# Altium PCB SSOP-TSSOP20.PcbDoc
Units mil, origin at the board's own origin, x right, y up, seen from the top; angles counter-clockwise.
Board outline 800 x 1000 mil, 2 copper layers (Top Layer, Bottom Layer); 3 components, 20 nets, 40 pads, 0 vias.
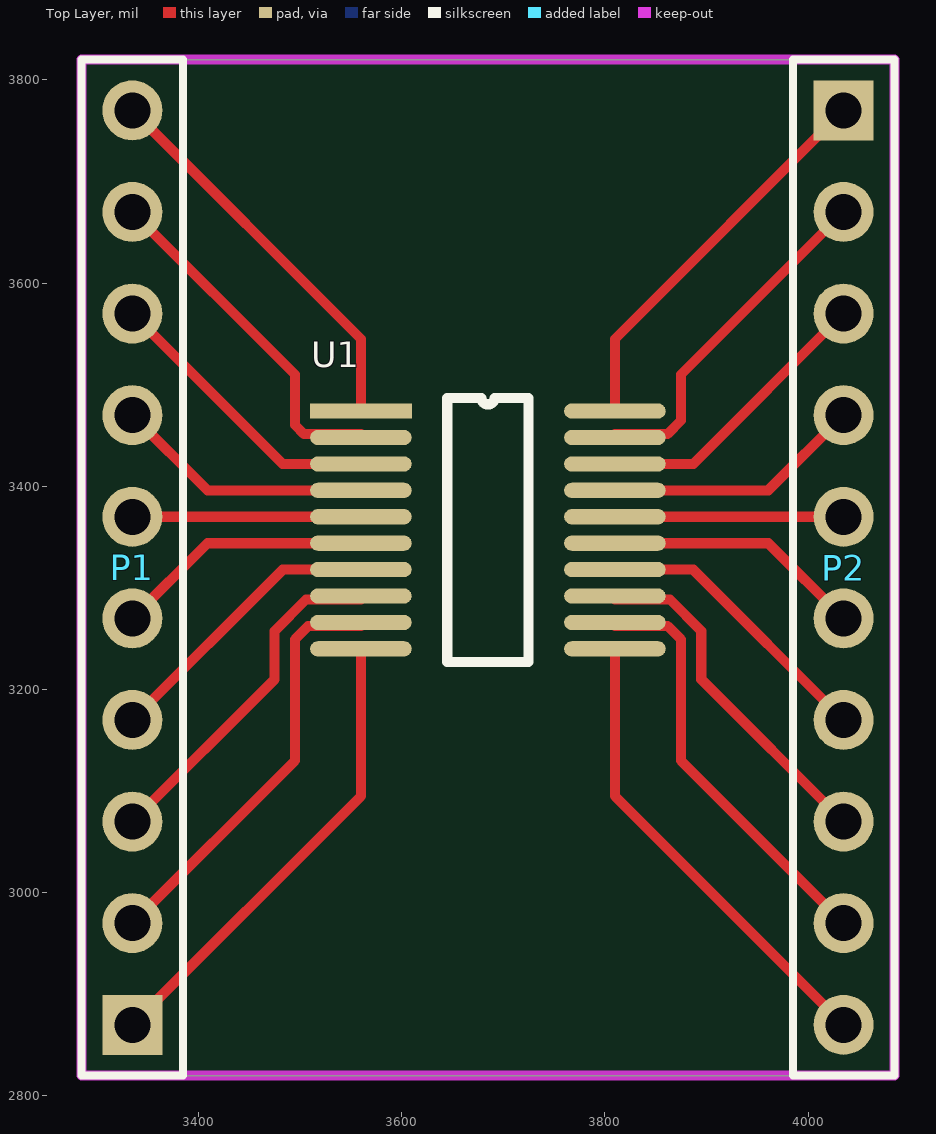
[diagram p0: Top Layer view]
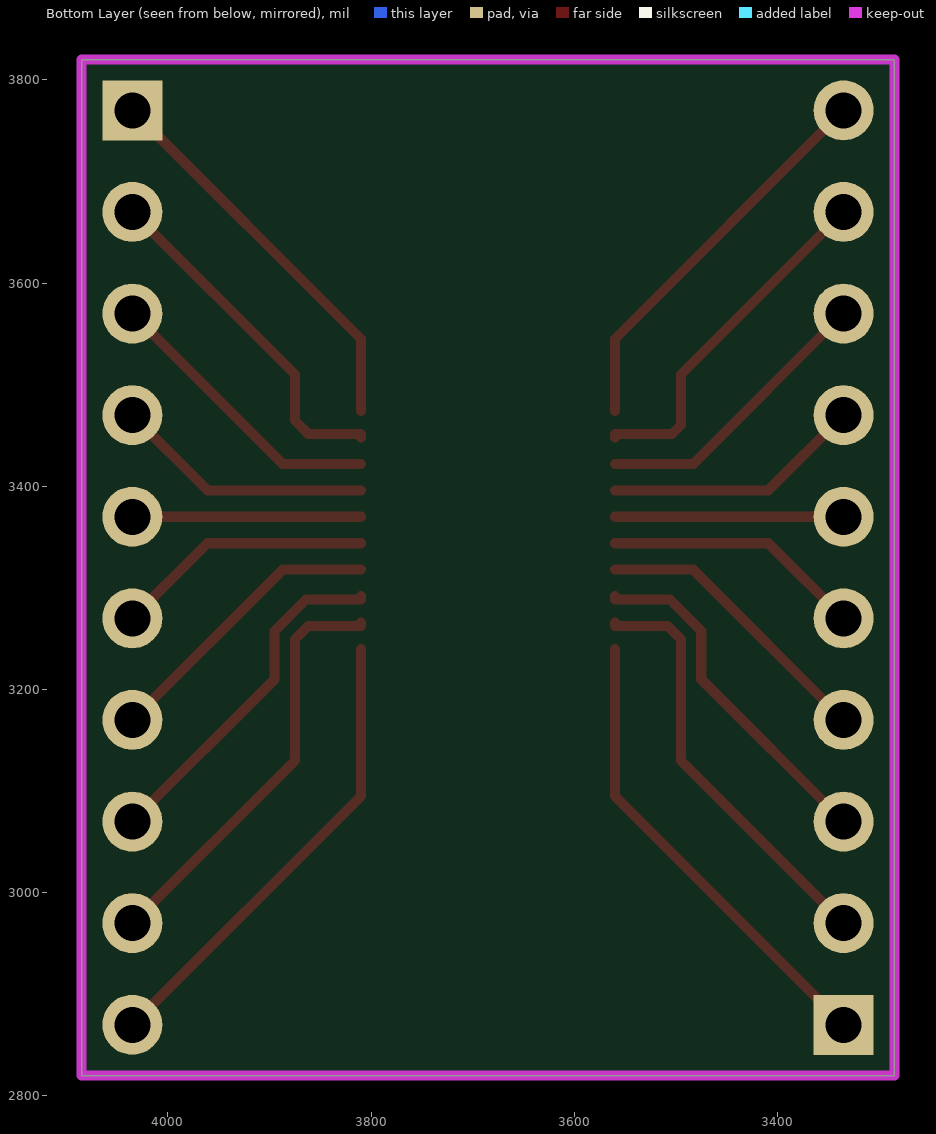
[diagram p1: Bottom Layer view, seen from below]

## Layer stack, top to bottom
Top Solder: solder mask 0.4, Solder Resist, Dk 3.5
Top Layer: signal copper 1.4
Dielectric 1: dielectric 12.6, FR-4, Dk 4.8
Bottom Layer: signal copper 1.4
Bottom Solder: solder mask 0.4, Solder Resist, Dk 3.5

## Board outline
3285,2820 4085,2820 4085,3820 3285,3820

## Design rules (kind name [scope] priority, off if disabled: settings)
Clearance [All] p1: gap=10 ignorepadtopadclearanceinfootprint=FALSE except(0: Arc-Hole Track-Hole SMDPad-Hole THPad-Hole Via-Hole Fill-Hole Poly-Hole Region-Hole Text-Hole)
PolygonConnect [All] p1: connectstyle=Relief reliefconductorwidth=10 reliefentries=4 polygonreliefangle="90 Angle" airgapwidth=10
RoutingVias [All] p1: holewidth=28 width=50 viastyle="Through Hole" minholewidth=28 minwidth=50 maxholewidth=28 maxwidth=50
SolderMaskExpansion [All] p1: expansion=4
Width [All] p1: maxlimit=10 minlimit=10 preferedwidth=10
30 further rules are at their usual default settings.

## Components (designator, comment, footprint, x,y, rotation, side; value= is the part's Value field where it differs from the comment)
P1 "Header 10" HDR1X10 3335,2870 r90 top
P2 "Header 10" HDR1X10 4035,3770 r270 top
U1 "SSOP-TSSOP20" SSOP-TSSOP20 3560,3474 r0 top (schematic designator *)

## Footprints (in the part's own frame and the unit in brackets; to place one, negate y for a bottom-side part, rotate by r counter-clockwise, add the part's x,y. Pads: shape width x height; smd on the part's side, far side on the other; paste and mask are expansions set on the pad)
HDR1X10 [mm] "Connector; Header; 10 Position"
  rect 1.5x1.5 hole 0.9: 1(0,0)
  round 1.5 hole 0.9: 2(2.54,0) 3(5.08,0) 4(7.62,0) 5(10.16,0) 6(12.7,0) 7(15.24,0) 8(17.78,0) 9(20.32,0) 10(22.86,0)
  silkscreen extent -1.27,-1.27 24.13,1.27
SSOP-TSSOP20 [mil]
  rect 100x15 smd: 1(0,0)
  oval 100x15 smd: 2(0,-26) 3(0,-52) 4(0,-78) 5(0,-104) 6(0,-130) 7(0,-156) 8(0,-182) 9(0,-208) 10(0,-234) 11(250,-234) 12(250,-208) 13(250,-182) 14(250,-156) 15(250,-130) 16(250,-104) 17(250,-78) 18(250,-52) 19(250,-26) 20(250,0)
  silkscreen extent 85,-247 165,13

## Part data
P1 P2: "Header, 10-Pin", LatestRevisionDate=17-Jul-2002, LatestRevisionNote="Re-released for DXP Platform.", Publisher="Altium Limited"

## Nets (pads, with @x,y where several pads share a name; then routed paths per layer and width w, separated by ;. In a path a pad name is that pad's centre, name@x,y a point inside that pad or via, vN(x,y) a via of type N, cw(c..) or ccw(c..) an arc to the next point about the centre after c; other vN are vias at no path point)
Net*_1: P1.10 U1.1 | length 389.2
  Top Layer w10: P1.10 3560,3545 U1.1
Net*_2: P1.9 U1.2 | length 348.1
  Top Layer w10: P1.9 3495,3510 3495,3460.29 3503.79,3451.5 3560,3451.5 U1.2
Net*_3: P1.8 U1.3 | length 286.3
  Top Layer w10: P1.8 3483,3422 U1.3
Net*_4: P1.7 U1.4 | length 255.7
  Top Layer w10: P1.7 3409,3396 U1.4
Net*_5: P1.6 U1.5 | length 225
  Top Layer w10: P1.6 U1.5
Net*_6: P1.5 U1.6 | length 255.7
  Top Layer w10: P1.5 3409,3344 U1.6
Net*_7: P1.4 U1.7 | length 286.3
  Top Layer w10: P1.4 3483,3318 U1.7
Net*_8: P1.3 U1.8 | length 346.9
  Top Layer w10: P1.3 3475,3210 3475,3257.6 3505.9,3288.5 3560,3288.5 U1.8
Net*_9: P1.2 U1.9 | length 419.6
  Top Layer w10: P1.2 3495,3130 3495,3249.32 3508.18,3262.5 3560,3262.5 U1.9
Net*_10: P1.1 U1.10 | length 463.2
  Top Layer w10: P1.1 3560,3095 U1.10
Net*_11: P2.10 U1.11 | length 463.2
  Top Layer w10: U1.11 3810,3095 P2.10
Net*_12: P2.9 U1.12 | length 419.6
  Top Layer w10: U1.12 3810,3262.5 3861.82,3262.5 3875,3249.32 3875,3130 P2.9
Net*_13: P2.8 U1.13 | length 346.9
  Top Layer w10: U1.13 3810,3288.5 3864.1,3288.5 3895,3257.6 3895,3210 P2.8
Net*_14: P2.7 U1.14 | length 286.3
  Top Layer w10: U1.14 3887,3318 P2.7
Net*_15: P2.6 U1.15 | length 255.7
  Top Layer w10: U1.15 3961,3344 P2.6
Net*_16: P2.5 U1.16 | length 225
  Top Layer w10: U1.16 P2.5
Net*_17: P2.4 U1.17 | length 255.7
  Top Layer w10: U1.17 3961,3396 P2.4
Net*_18: P2.3 U1.18 | length 286.3
  Top Layer w10: U1.18 3887,3422 P2.3
Net*_19: P2.2 U1.19 | length 345.6
  Top Layer w10: U1.19 3810,3451.5 3861.82,3451.5 3875,3464.68 3875,3510 P2.2
Net*_20: P2.1 U1.20 | length 389.2
  Top Layer w10: U1.20 3810,3545 P2.1

## Keep-outs
Keep-Out Layer:
  the board outline again, w10